# Altium PCB TemperatureSensorBlockPCB1.PcbDoc
Units mil, origin at the board's own origin, x right, y up, seen from the top; angles counter-clockwise.
Board outline 6000 x 6000 mil, 2 copper layers (Top Layer, Bottom Layer); 74 components, 43 nets, 214 pads, 34 vias.
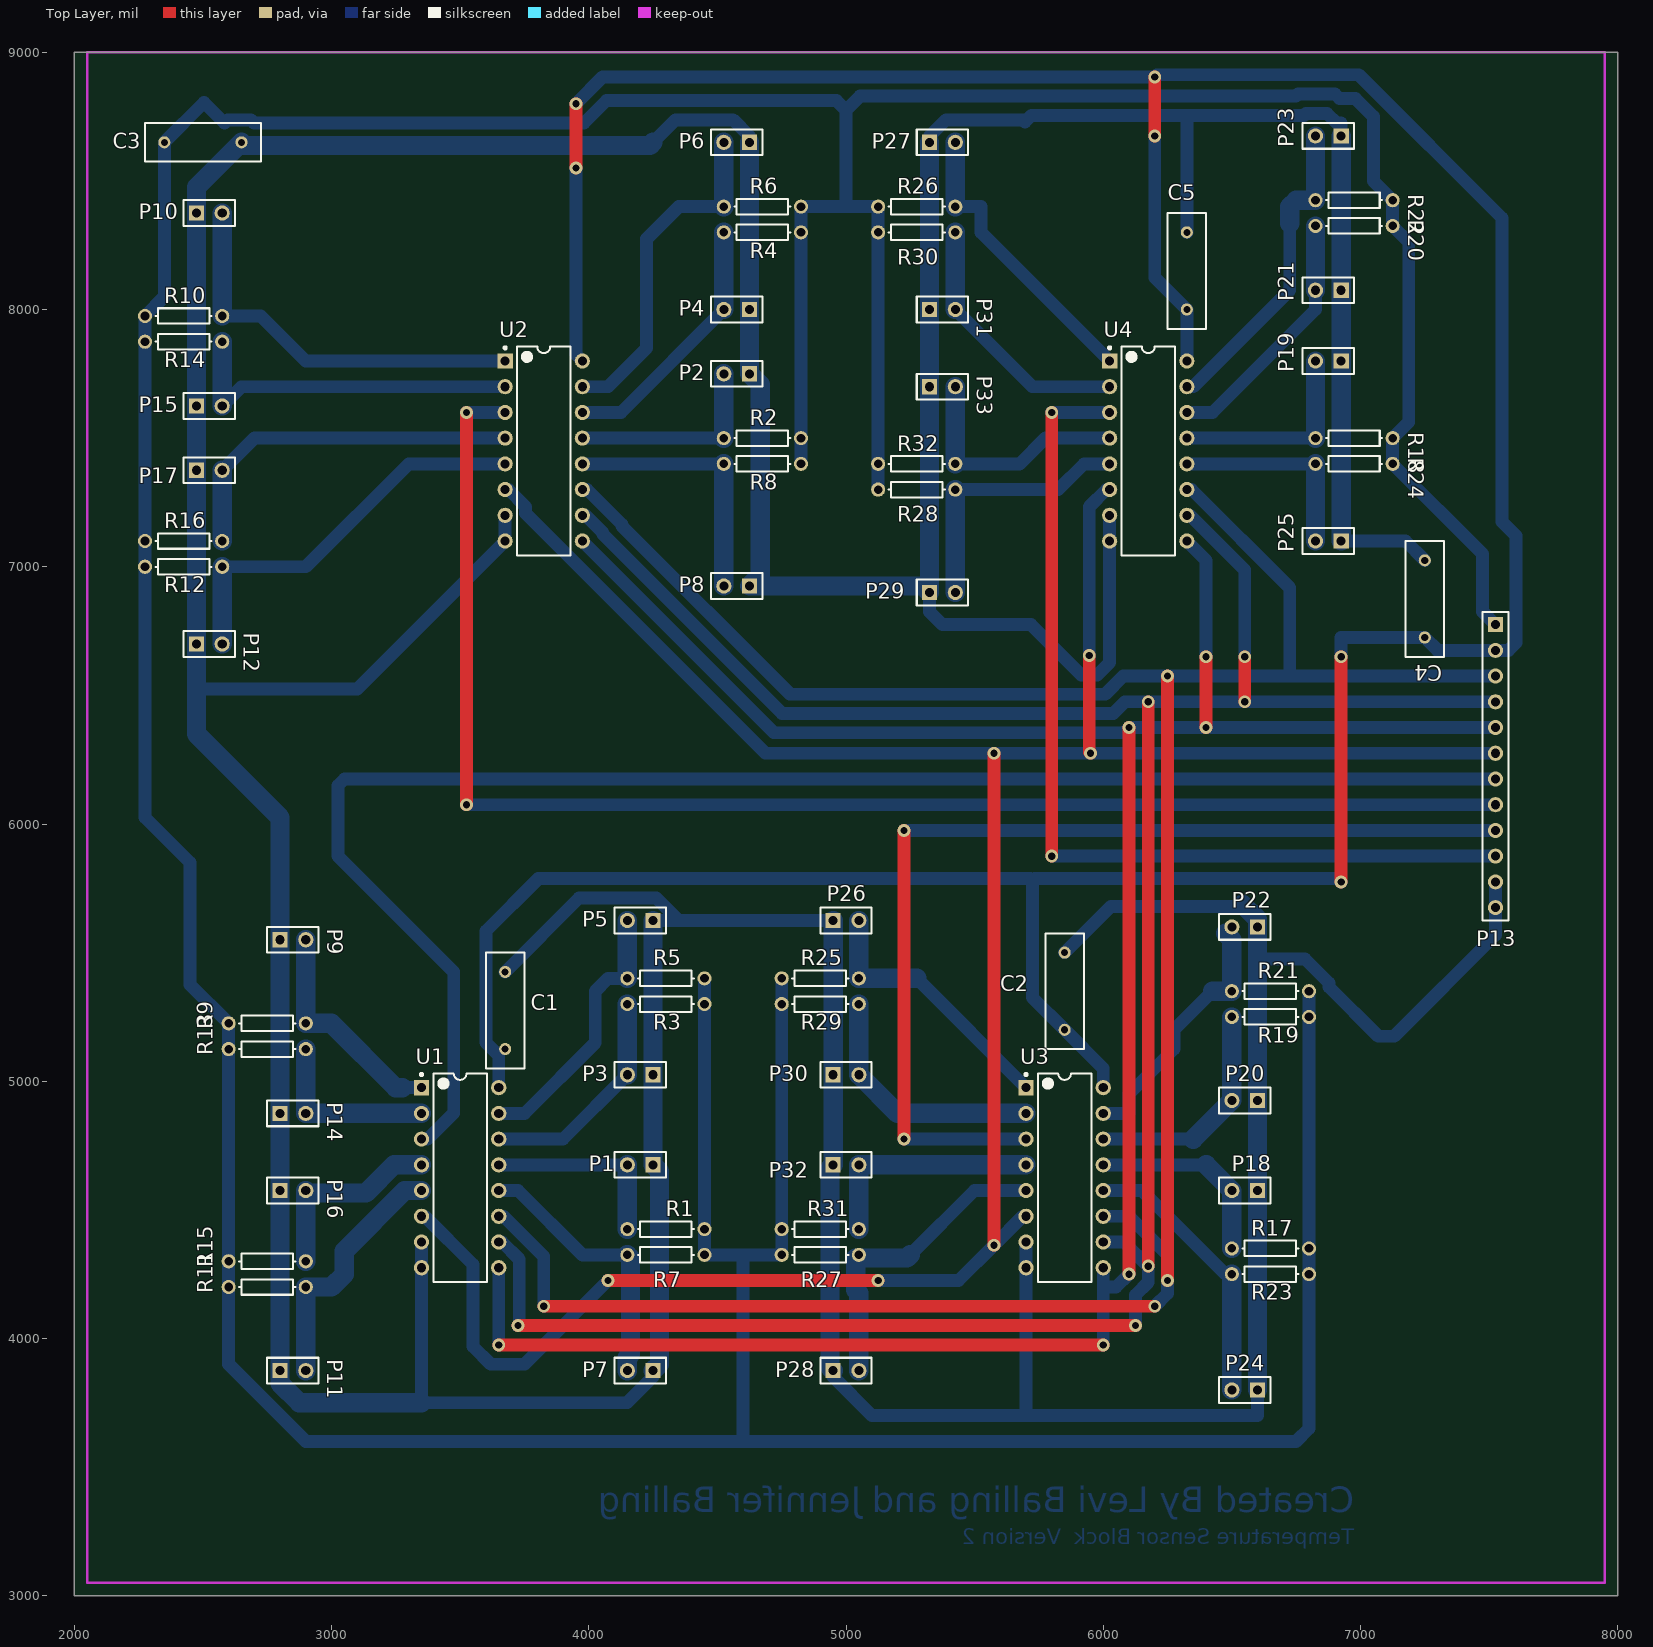
[diagram p0: Top Layer view]
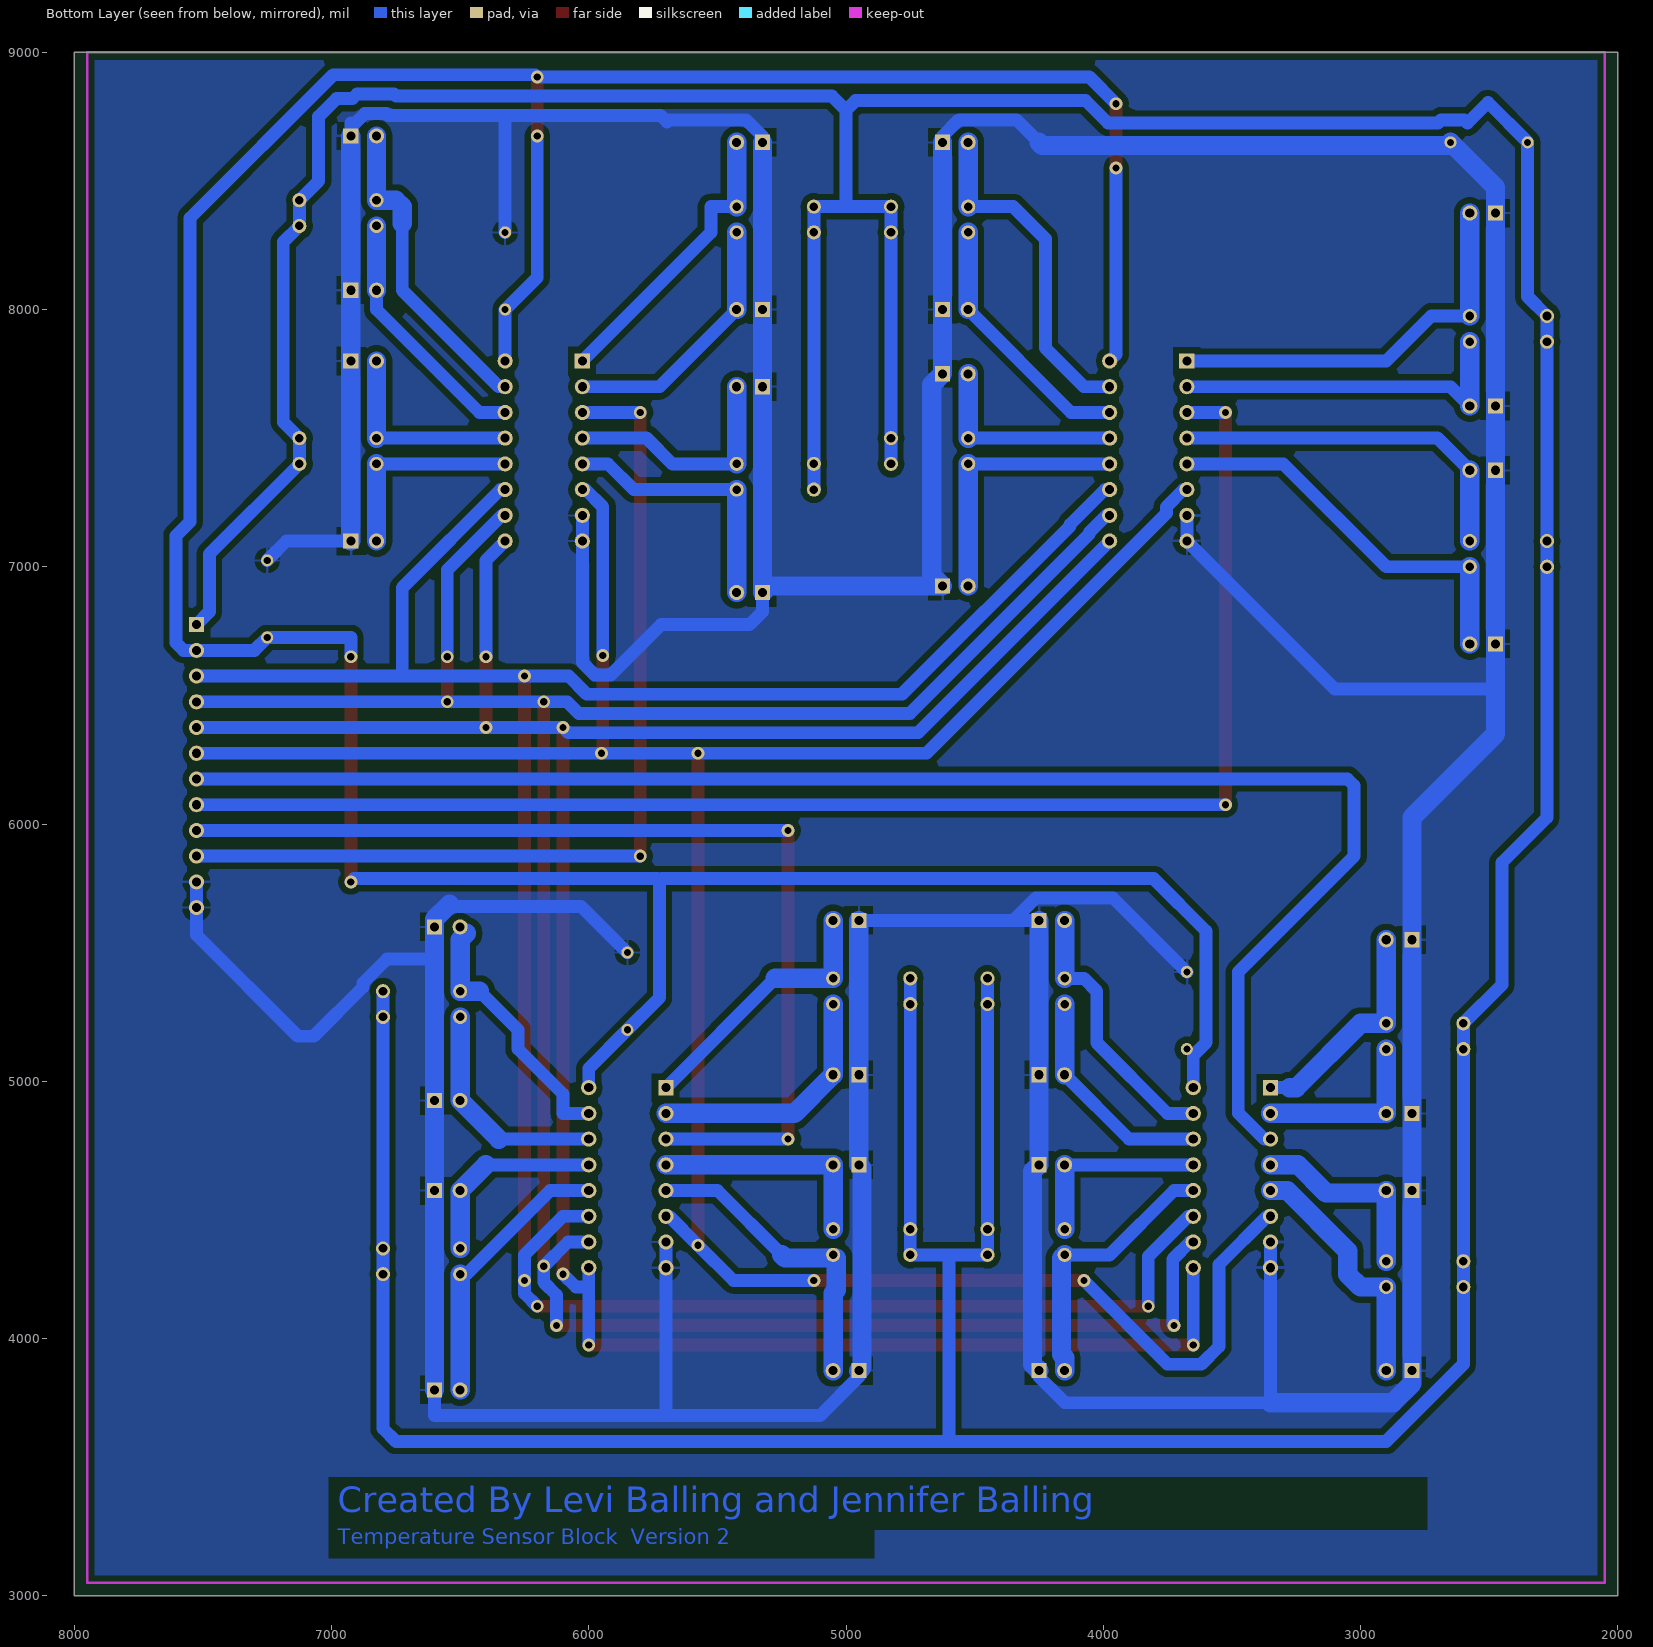
[diagram p1: Bottom Layer view, seen from below]

## Layer stack, top to bottom
Top Layer: signal copper 1.4
Dielectric: dielectric 12.6, FR-4, Dk 4.8
Bottom Layer: signal copper 1.4

## Board outline
2000,3000 8000,3000 8000,9000 2000,9000

## Design rules (kind name [scope] priority, off if disabled: settings)
Clearance [All] p1: gap=25
PolygonConnect [All] p1: connectstyle=Relief reliefconductorwidth=10 reliefentries=4 polygonreliefangle="90 Angle"
RoomDefinition TemperatureSensorBlock [InComponentClass('TemperatureSensorBlock')] p1: confinementstyle=ConfineIn formatcopy=TRUE lockcomponents=FALSE outline 2050,9000 7950,9000 7950,3050 2050,3050
RoutingVias [All] p1: holewidth=32 width=62 viastyle="Through Hole" minholewidth=28 minwidth=50 maxholewidth=28 maxwidth=50
SilkscreenOverComponentPads [All] p1: minsilkscreentomaskgap=10
SolderMaskExpansion [All] p1: expansion=4
Width [All] p1: maxlimit=100 minlimit=25 preferedwidth=25 minimp=50.000000 maximp=50.000000 favimp=50.000000
27 further rules are at their usual default settings.

## Components (designator, comment, footprint, x,y, rotation, side; value= is the part's Value field where it differs from the comment)
C1 "Cap" RAD-0.3 3675,5275 r270 top
C2 "Cap" RAD-0.3 5850,5350 r270 top
C3 "Cap" RAD-0.3 2500,8650 r180 top
C4 "Cap" RAD-0.3 7250,6875 r270 top
C5 "Cap" RAD-0.3 6325,8150 r270 top
P1 "Header 2" HDR1X2 4250,4675 r180 top
P2 "Header 2" HDR1X2 4625,7750 r180 top
P3 "Header 2" HDR1X2 4250,5025 r180 top
P4 "Header 2" HDR1X2 4625,8000 r180 top
P5 "Header 2" HDR1X2 4250,5625 r180 top
P6 "Header 2" HDR1X2 4625,8650 r180 top
P7 "Header 2" HDR1X2 4250,3875 r180 top
P8 "Header 2" HDR1X2 4625,6925 r180 top
P9 "Header 2" HDR1X2 2800,5550 r0 top
P10 "Header 2" HDR1X2 2475,8375 r0 top
P11 "Header 2" HDR1X2 2800,3875 r0 top
P12 "Header 2" HDR1X2 2475,6700 r0 top
P13 "Header 12" HDR1X12 7525,6775 r270 top
P14 "Header 2" HDR1X2 2800,4875 r0 top
P15 "Header 2" HDR1X2 2475,7625 r0 top
P16 "Header 2" HDR1X2 2800,4575 r0 top
P17 "Header 2" HDR1X2 2475,7375 r0 top
P18 "Header 2" HDR1X2 6600,4575 r180 top
P19 "Header 2" HDR1X2 6925,7800 r180 top
P20 "Header 2" HDR1X2 6600,4925 r180 top
P21 "Header 2" HDR1X2 6925,8075 r180 top
P22 "Header 2" HDR1X2 6600,5600 r180 top
P23 "Header 2" HDR1X2 6925,8675 r180 top
P24 "Header 2" HDR1X2 6600,3800 r180 top
P25 "Header 2" HDR1X2 6925,7100 r180 top
P26 "Header 2" HDR1X2 4950,5625 r0 top
P27 "Header 2" HDR1X2 5325,8650 r0 top
P28 "Header 2" HDR1X2 4950,3875 r0 top
P29 "Header 2" HDR1X2 5325,6900 r0 top
P30 "Header 2" HDR1X2 4950,5025 r0 top
P31 "Header 2" HDR1X2 5325,8000 r0 top
P32 "Header 2" HDR1X2 4950,4675 r0 top
P33 "Header 2" HDR1X2 5325,7700 r0 top
R1 "Res1" AXIAL-0.3 4300,4425 r0 top
R2 "Res1" AXIAL-0.3 4675,7500 r0 top
R3 "Res1" AXIAL-0.3 4300,5300 r0 top
R4 "Res1" AXIAL-0.3 4675,8300 r0 top
R5 "Res1" AXIAL-0.3 4300,5400 r0 top
R6 "Res1" AXIAL-0.3 4675,8400 r0 top
R7 "Res1" AXIAL-0.3 4300,4325 r0 top
R8 "Res1" AXIAL-0.3 4675,7400 r0 top
R9 "Res1" AXIAL-0.3 2750,5225 r180 top
R10 "Res1" AXIAL-0.3 2425,7975 r180 top
R11 "Res1" AXIAL-0.3 2750,4200 r180 top
R12 "Res1" AXIAL-0.3 2425,7000 r180 top
R13 "Res1" AXIAL-0.3 2750,5125 r180 top
R14 "Res1" AXIAL-0.3 2425,7875 r180 top
R15 "Res1" AXIAL-0.3 2750,4300 r180 top
R16 "Res1" AXIAL-0.3 2425,7100 r180 top
R17 "Res1" AXIAL-0.3 6650,4350 r0 top
R18 "Res1" AXIAL-0.3 6975,7500 r0 top
R19 "Res1" AXIAL-0.3 6650,5250 r0 top
R20 "Res1" AXIAL-0.3 6975,8325 r0 top
R21 "Res1" AXIAL-0.3 6650,5350 r0 top
R22 "Res1" AXIAL-0.3 6975,8425 r0 top
R23 "Res1" AXIAL-0.3 6650,4250 r0 top
R24 "Res1" AXIAL-0.3 6975,7400 r0 top
R25 "Res1" AXIAL-0.3 4900,5400 r180 top
R26 "Res1" AXIAL-0.3 5275,8400 r180 top
R27 "Res1" AXIAL-0.3 4900,4325 r180 top
R28 "Res1" AXIAL-0.3 5275,7300 r180 top
R29 "Res1" AXIAL-0.3 4900,5300 r180 top
R30 "Res1" AXIAL-0.3 5275,8300 r180 top
R31 "Res1" AXIAL-0.3 4900,4425 r180 top
R32 "Res1" AXIAL-0.3 5275,7400 r180 top
U1 "CD4051BCN" N16E 3500,4625 r0 top
U2 "CD4051BCN" N16E 3825,7450 r0 top
U3 "CD4051BCN" N16E 5850,4625 r0 top
U4 "CD4051BCN" N16E 6175,7450 r0 top

## Footprints (in the part's own frame and the unit in brackets; to place one, negate y for a bottom-side part, rotate by r counter-clockwise, add the part's x,y. Pads: shape width x height; smd on the part's side, far side on the other; paste and mask are expansions set on the pad)
AXIAL-0.3 [mm] "Axial Device, Thru-Hole; 2 Leads; 0.3 in Pin Spacing"
  round 1.4 hole 0.85: 1(-3.81,0) 2(3.81,0)
  silkscreen extent -2.77,-0.76 2.77,0.76
HDR1X2 [mm] "Connector; Header; 2 Position"
  rect 1.5x1.5 hole 0.9: 1(0,0)
  round 1.5 hole 0.9: 2(2.54,0)
  silkscreen extent -1.27,-1.27 3.81,1.27
HDR1X12 [mm] "Connector; Header; 12 Position"
  rect 1.5x1.5 hole 0.9: 1(0,0)
  round 1.5 hole 0.9: 2(2.54,0) 3(5.08,0) 4(7.62,0) 5(10.16,0) 6(12.7,0) 7(15.24,0) 8(17.78,0) 9(20.32,0) 10(22.86,0) 11(25.4,0) 12(27.94,0)
  silkscreen extent -1.27,-1.27 29.21,1.27
N16E [mm] "DIP, 16-Leads, Row Spacing 7.62mm, Pitch 2.54mm, Body 19.3x6.35mm"
  rect 1.5x1.5 hole 0.9: 1(-3.81,8.89)
  round 1.5 hole 0.9: 2(-3.81,6.35) 3(-3.81,3.81) 4(-3.81,1.27) 5(-3.81,-1.27) 6(-3.81,-3.81) 7(-3.81,-6.35) 8(-3.81,-8.89) 9(3.81,-8.89) 10(3.81,-6.35) 11(3.81,-3.81) 12(3.81,-1.27) 13(3.81,1.27) 14(3.81,3.81) 15(3.81,6.35) 16(3.81,8.89)
  silkscreen extent -3.93,-10.3 2.65,10.31, body extent -3.6,-10.28 3.6,10.28, height 5.08
RAD-0.3 [mm] "Radial Cap, Thru-Hole; 2 Leads; 0.3 in Pin Spacing"
  round 1.2 hole 0.7: 1(-3.81,0) 2(3.81,0)
  silkscreen extent -5.71,-1.91 5.71,1.91

## Part data
C1 C2 C3 C4 C5: "Capacitor"
P1 P2 P3 P4 P5 P6 P7 P8 P9 P10 P11 P12 P14 P15 P16 P17 P18 P19 P20 P21 P22 P23 P24 P25 P26 P27 P28 P29 P30 P31 P32 P33: "Header, 2-Pin"
P13: "Header, 12-Pin"
R1 R2 R3 R4 R5 R6 R7 R8 R9 R10 R11 R12 R13 R14 R15 R16 R17 R18 R19 R20 R21 R22 R23 R24 R25 R26 R27 R28 R29 R30 R31 R32: "Resistor"
U1 U2 U3 U4: "8-Channel Analog Multiplexer/Demultiplexer"

## Via types
v1: diameter 50, hole 28, Top Layer to Bottom Layer, 34 vias

## Nets (pads, with @x,y where several pads share a name; then routed paths per layer and width w, separated by ;. In a path a pad name is that pad's centre, name@x,y a point inside that pad or via, vN(x,y) a via of type N, cw(c..) or ccw(c..) an arc to the next point about the centre after c; other vN are vias at no path point)
ANALOG_OUT_1: P13.7 U1.3 | length 6137.4
  Bottom Layer w50: U1.3 3373.74,4775 3475,4876.26 3475,5425 3025,5875 3025,6150 3050,6175 P13.7
ANALOG_OUT_2: P13.8 U2.3 | length 5675
  Top Layer w50: v1(3525,6075) v1(3525,7600)
  Bottom Layer w50: v1(3525,6075) P13.8 ; v1(3525,7600) U2.3
ANALOG_OUT_3: P13.9 U3.3 | length 3975
  Top Layer w50: v1(5225,4775) v1(5225,5975)
  Bottom Layer w50: v1(5225,4775) U3.3 ; v1(5225,5975) P13.9
ANALOG_OUT_4: P13.10 U4.3 | length 3675
  Top Layer w50: v1(5800,5875) v1(5800,7600)
  Bottom Layer w50: v1(5800,5875) P13.10 ; v1(5800,7600) U4.3
CHANNEL_DEMUX_A: P13.3 U1.11 U2.11 U3.11 U4.11 | length 10505
  Top Layer w50: v1(3825,4125) v1(6200,4125) ; v1(6250,4225) v1(6250,6575)
  Bottom Layer w50: U1.11 3668.53,4475 3825,4318.53 v1(3825,4125) ; U2.11 3993.53,7300 4129.53,7164.01 4129.53,7157.94 4782.94,6504.53 6007.6,6504.53 6078.08,6575 v1(6250,6575) 6725,6575 ; U3.11 6100,4475 6250,4325 v1(6250,4225) 6250,4175 v1(6200,4125) ; U4.11 6343.53,7300 6725,6918.53 6725,6575 ; P13.3 6725,6575
CHANNEL_DEMUX_B: P13.4 U1.10 U2.10 U3.10 U4.10 | length 10143.8
  Top Layer w50: v1(3725,4050) v1(6125,4050) ; v1(6175,4281.07) v1(6175,6475) ; v1(6550,6475) v1(6550,6650)
  Bottom Layer w50: U1.10 3662.47,4375 3729.53,4307.94 3729.53,4054.53 v1(3725,4050) ; U2.10 3987.47,7200 4054.53,7132.94 4054.53,7126.88 4751.88,6429.53 6038.67,6429.53 6084.14,6475 v1(6175,6475) v1(6550,6475) P13.4 ; U3.10 6081.07,4375 v1(6175,4281.07) 6175,4218.93 6125,4168.93 v1(6125,4050) ; U4.10 6337.47,7200 6550,6987.47 v1(6550,6650)
CHANNEL_DEMUX_C: P13.5 U1.9 U2.9 U3.9 U4.9 | length 9819
  Top Layer w50: v1(3650,3975) v1(6000,3975) ; v1(6100,4250) v1(6100,6375) ; v1(6400,6375) v1(6400,6650)
  Bottom Layer w50: v1(3650,3975) U1.9 ; U2.9 4720.47,6354.53 6079.53,6354.53 v1(6100,6375) v1(6400,6375) P13.5 ; v1(6000,3975) 6000,4200 ; U3.9 6000,4200 ; v1(6100,4250) 6050,4200 6000,4200 ; U4.9 6400,7025 v1(6400,6650)
CHANNEL_DEMUX_EN: P13.6 U1.6 U2.6 U3.6 U4.6 | length 10269.3
  Top Layer w50: v1(4075,4225) v1(5125,4225) ; v1(5575,4362.47) v1(5575,6275) ; v1(5945.47,6654.53) 5945.47,6279.53 v1(5950,6275)
  Bottom Layer w50: U1.6 3362.47,4475 3550,4287.47 3550,3968.93 3618.93,3900 3750,3900 v1(4075,4225) ; U2.6 3687.47,7300 3754.53,7232.94 3754.53,7208 4687.53,6275 v1(5575,6275) v1(5950,6275) P13.6 ; v1(5125,4225) 5437.53,4225 v1(5575,4362.47) 5687.53,4475 U3.6 ; v1(5945.47,6654.53) 5945.47,7232.94 U4.6@6012.53,7300
GND: C1.1 C2.1 C3.1 C4.1 C5.1 P1.1 P2.1 P3.1 P4.1 P5.1 P6.1 P7.1 P8.1 P9.1 P10.1 P11.1 P12.1 P13.11 P13.12 P14.1 P15.1 P16.1 P17.1 P18.1 P19.1 P20.1 P21.1 P22.1 P23.1 P24.1 P25.1 P26.1 P27.1 P28.1 P29.1 P30.1 P31.1 P32.1 P33.1 U1.7 U1.8 U2.7 U2.8 U3.7 U3.8 U4.7 U4.8 | length 32278.2
  Bottom Layer w50: 2475,6525 3100,6525 U2.8 U2.7 ; U1.7 U1.8 3350,3750 4148.74,3750 4250,3851.26 P7.1 ; C1.1 3962.5,5712.5 4262.5,5712.5 4350,5625 ; P5.1 4350,5625 ; 4250,8650 4337.5,8737.5 4561.24,8737.5 4625,8673.74 P6.1 ; P28.1@4950,3862.53 4950,3851.26 5101.26,3700 5700,3700 ; P26.1 4350,5625 ; P29.1 5325,6825 5375,6775 5718.93,6775 5914.41,6579.53 5976.54,6579.53 6025,6627.99 U4.8 U4.7 ; P27.1 5325,8673.74 5388.76,8737.5 5687.5,8737.5 5695.47,8729.53 5720.47,8754.53 6325,8754.53 ; U3.7 U3.8 5700,3700 ; C2.1 6029.53,5679.53 6532.94,5679.53 ; C5.1 6325,8754.53 ; P24.1 6600,3700 5700,3700 ; 6600,5475 6784.69,5475 6877.56,5382.13 6877.56,5366.37 7068.93,5175 7131.07,5175 7525,5568.93 P13.12 P13.11 ; P25.1 7175,7100 C4.1 ; P23.1 6925,8725 6907.87,8725 6870.37,8762.5 6788.76,8762.5 6780.78,8754.53 6325,8754.53
  Bottom Layer w75: 3350,3750 2875,3750 2800,3825 P11.1 P16.1 P14.1 P9.1 2800,6025 2475,6350 2475,6525 P12.1 P17.1 P15.1 P10.1 2475,8475 C3.1 2662.5,8637.5 4237.5,8637.5 4250,8650 ; P7.1 4275,3900 4275,4650 P1.1 P3.1 P5.1 ; P6.1 P4.1 P2.1 4666.35,7708.65 4666.35,6966.35 P8.1 5300,6925 P29.1 P33.1 P31.1 P27.1 ; P28.1 4937.5,3887.5 4937.5,4662.5 P32.1 P30.1 P26.1 ; 6541.78,5688.37 6600,5630.15 P22.1 6600,5475 P20.1 P18.1 P24.1 ; P25.1 P19.1 P21.1 P23.1
NetP1_2: P1.2 R1.1 U1.13 | length 750
  Bottom Layer w50: U1.13 P1.2
  Bottom Layer w75: R1.1 P1.2
NetP2_2: P2.2 R2.1 U2.13 | length 800
  Bottom Layer w50: U2.13 R2.1
  Bottom Layer w75: R2.1 P2.2
NetP3_2: P3.2 R3.1 U1.14 | length 878.6
  Bottom Layer w50: U1.14 3900,4775 P3.2
  Bottom Layer w75: P3.2 R3.1
NetP4_2: P4.2 R4.1 U2.14 | length 1015.7
  Bottom Layer w50: U2.14 4125,7600 P4.2
  Bottom Layer w75: P4.2 R4.1
NetP5_2: P5.2 R5.1 U1.15 | length 1059.6
  Bottom Layer w50: U1.15 3750,4875 4025,5150 4025,5350 4075,5400 R5.1
  Bottom Layer w75: R5.1 P5.2
NetP6_2: P6.2 R6.1 U2.15 | length 1338.9
  Bottom Layer w50: U2.15 4075,7700 4225,7850 4225,8275 4350,8400 R6.1
  Bottom Layer w75: R6.1 P6.2
NetP7_2: P7.2 R7.1 U1.12 | length 1063.9
  Bottom Layer w50: U1.12 3725,4575 3975,4325 R7.1
  Bottom Layer w75: P7.2 4150,3925 4162.5,3937.5 4162.5,4312.5 R7.1
NetP8_2: P8.2 R8.1 U2.12 | length 1025
  Bottom Layer w50: U2.12 R8.1
  Bottom Layer w75: P8.2 R8.1
NetP9_2: P9.2 R9.1 U1.1 | length 878.6
  Bottom Layer w50: 3275,4975 U1.1
  Bottom Layer w75: P9.2 R9.1 3000,5225 3250,4975 3275,4975
NetP10_2: P10.2 R10.1 U2.1 | length 1572.5
  Bottom Layer w50: R10.1 2725,7975 2900,7800 U2.1
  Bottom Layer w75: R10.1 P10.2
NetP11_2: P11.2 R11.1 U1.5 | length 983.2
  Bottom Layer w75: P11.2 R11.1 3000,4200 3050,4250 3050,4340.31 3284.69,4575 U1.5
NetP12_2: P12.2 R12.1 U2.5 | length 1565.7
  Bottom Layer w50: R12.1 2900,7000 3300,7400 U2.5
  Bottom Layer w75: P12.2 R12.1
NetP14_2: P14.2 R13.1 U1.2 | length 700
  Bottom Layer w75: R13.1 P14.2 U1.2
NetP15_2: P15.2 R14.1 U2.2 | length 1381.1
  Bottom Layer w50: P15.2 2650,7700 U2.2
  Bottom Layer w75: P15.2 R14.1
NetP16_2: P16.2 R15.1 U1.4 | length 774.2
  Bottom Layer w75: R15.1 P16.2 2909.44,4565.56 3133.83,4565.56 3243.26,4675 U1.4
NetP17_2: P17.2 R16.1 U2.4 | length 1426.8
  Bottom Layer w50: P17.2 2700,7500 U2.4
  Bottom Layer w75: R16.1 P17.2
NetP18_2: P18.2 R17.1 U3.13 | length 766.4
  Bottom Layer w50: U3.13 6400,4675
  Bottom Layer w75: 6400,4675 P18.2 R17.1
NetP19_2: P19.2 R18.1 U4.13 | length 800
  Bottom Layer w50: U4.13 R18.1
  Bottom Layer w75: R18.1 P19.2
NetP20_2: P20.2 R19.1 U3.14 | length 887.1
  Bottom Layer w50: U3.14 6350,4775
  Bottom Layer w75: 6350,4775 P20.2 R19.1
NetP21_2: P21.2 R20.1 U4.14 | length 990.7
  Bottom Layer w50: U4.14 6425,7600 6825,8000 P21.2
  Bottom Layer w75: P21.2 R20.1
NetP22_2: P22.2 R21.1 U3.15 | length 1020
  Bottom Layer w50: U3.15 6100,4875 6100,4950 6275,5125 6275,5200 6425,5350
  Bottom Layer w75: 6425,5350 R21.1 6500,5550 6475,5575
NetP23_2: P23.2 R22.1 U4.15 | length 1240.7
  Bottom Layer w50: U4.15 6350,7700 6725,8075 6725,8334.69
  Bottom Layer w75: 6725,8334.69 6725,8400 6750,8425 R22.1 P23.2
NetP24_2: P24.2 R23.1 U3.12 | length 1084.6
  Bottom Layer w50: U3.12 6150,4575 6475,4250 R23.1
  Bottom Layer w75: P24.2 R23.1
NetP25_2: P25.2 R24.1 U4.12 | length 800
  Bottom Layer w50: U4.12 R24.1
  Bottom Layer w75: P25.2 R24.1
NetP26_2: P26.2 R25.1 U3.1 | length 1051
  Bottom Layer w50: 5275,5400 U3.1
  Bottom Layer w75: P26.2 R25.1 5275,5400
NetP27_2: P27.2 R26.1 U4.1 | length 1157.1
  Bottom Layer w50: R26.1 5525,8400 5525,8300 U4.1
  Bottom Layer w75: R26.1 P27.2
NetP28_2: P28.2 R27.1 U3.5 | length 1213.9
  Bottom Layer w50: 5250,4325 5500,4575 U3.5
  Bottom Layer w75: P28.2 5050,4176.26 5037.5,4188.76 5037.5,4312.5 5237.5,4312.5 5250,4325
NetP29_2: P29.2 R28.1 U4.5 | length 1041.4
  Bottom Layer w50: R28.1 5825,7300 5925,7400 U4.5
  Bottom Layer w75: P29.2 R28.1
NetP30_2: P30.2 R29.1 U3.2 | length 987.1
  Bottom Layer w75: R29.1 P30.2 5200,4875 U3.2
NetP31_2: P31.2 R30.1 U4.2 | length 1024.3
  Bottom Layer w50: P31.2 5725,7700 U4.2
  Bottom Layer w75: P31.2 R30.1
NetP32_2: P32.2 R31.1 U3.4 | length 900
  Bottom Layer w75: R31.1 P32.2 U3.4
NetP33_2: P33.2 R32.1 U4.4 | length 941.4
  Bottom Layer w50: R32.1 5675,7400 5775,7500 U4.4
  Bottom Layer w75: R32.1 P33.2
VCC: C1.2 C2.2 C4.2 C5.2 P13.2 U1.16 U2.16 U3.16 U4.16 | length 14349.6
  Top Layer w50: v1(3950,8550) v1(3950,8800) ; v1(6200,8675) v1(6200,8904.53) ; v1(6925,5775) v1(6925,6650)
  Bottom Layer w50: U1.16 3650,5100 3600,5150 3600,5584.06 3803.44,5787.5 5717.03,5787.5 5725,5779.53 ; v1(3950,8550) 3950,7825 U2.16 ; v1(3950,8800) 4054.53,8904.53 v1(6200,8904.53) 6207.97,8912.5 6993.57,8912.5 7550,8356.07 7550,7175 7604.53,7120.47 7604.53,6704.53 7575,6675 P13.2 7300,6675 C4.2 6925,6725 v1(6925,6650) ; U3.16 6000,5050 C2.2 5725,5325 5725,5779.53 ; v1(6200,8675) 6200,8125 C5.2 U4.16 ; v1(6925,5775) 6912.5,5787.5 5732.97,5787.5 5725,5779.53
VCC12: C3.2 P13.1 R1.2 R2.2 R3.2 R4.2 R5.2 R6.2 R7.2 R8.2 R9.2 R10.2 R11.2 R12.2 R13.2 R14.2 R15.2 R16.2 R17.2 R18.2 R19.2 R20.2 R21.2 R22.2 R23.2 R24.2 R25.2 R26.2 R27.2 R28.2 R29.2 R30.2 R31.2 R32.2 | length 24055.4
  Bottom Layer w50: R5.2 R3.2 R1.2 R7.2 4600,4325 ; R25.2 R29.2 R31.2 R27.2 4600,4325 ; R8.2 R2.2 R4.2 R6.2 5000,8400 ; R28.2 R32.2 R30.2 R26.2 5000,8400 ; R21.2 R19.2 R17.2 R23.2 6800,3650 6750,3600 4600,3600 ; P13.1 7475,6825 7475,7050 R24.2 R18.2 7187.5,7562.5 7187.5,8262.5 R20.2 R22.2 7050,8500 7050,8750 6980,8820 6918.93,8820 6901.43,8837.5 6757.69,8837.5 6749.72,8829.53 5054.53,8829.53 5000,8775 ; 4600,3600 4600,4325 ; 4600,3600 2900,3600 2600,3900 R11.2 R15.2 R13.2 R9.2 2450,5375 2450,5850 2275,6025 R12.2 R16.2 R14.2 R10.2 2350,8050 C3.2 2504.53,8804.53 2584.06,8725 2596.56,8737.5 2686.24,8737.5 2698.74,8725 3981.07,8725 4068.57,8812.5 4962.5,8812.5 5000,8775 ; 5000,8400 5000,8775

## Polygon pours and split planes (outlines as drawn)
GND on Bottom Layer "GNDPlan" (solid, pour order 3): 7950,9000 2050,9000 2050,3050 7950,3050

## Keep-outs
Keep-Out Layer:
  lines w10: 2050,3050 2050,9000 7950,9000 7950,3050 2050,3050

## Other copper
Bottom Layer:
  text "Created By Levi Balling and Jennifer Balling" at 6975,3325 h100
  text "Temperature Sensor Block  Version 2" at 6975,3200 h60

## Silkscreen, mask and mechanical layers (free items; w line width, h text height)
Drill Drawing:
  text ".LEGEND" at 8200,3200 h60
  text "Drill Drawing." at 8200,3100 h60

## Dimensions
2050,3050 to 2050,9000 on Mechanical 1
2050,3050 to 7950,3050 on Mechanical 1